# Altium PCB USB-C-SMD_TYPE-C-6P.pcbdoc
Units mm, origin at the board's own origin, x right, y up, seen from the top; angles counter-clockwise.
Board outline 22.74 x 20.06 mm, 2 copper layers (Top Layer, Bottom Layer); 1 components, 0 nets, 10 pads, 0 vias.
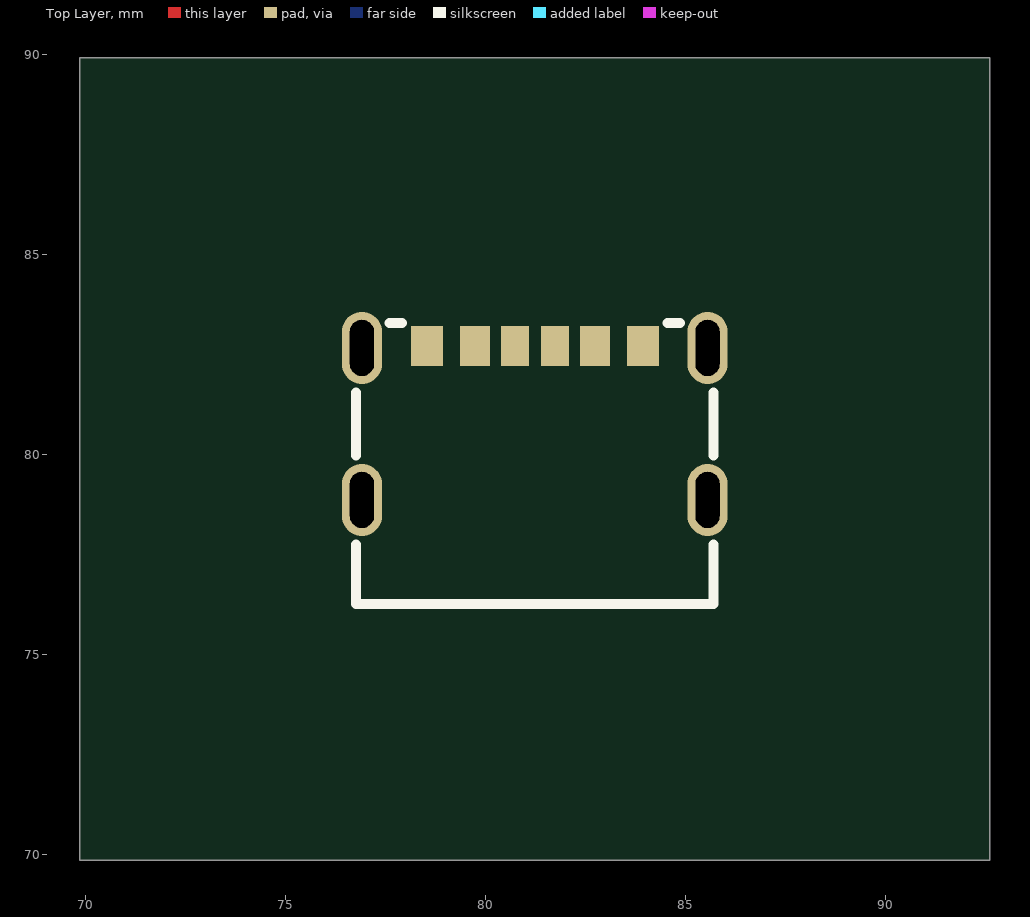
[diagram p0: Top Layer view]
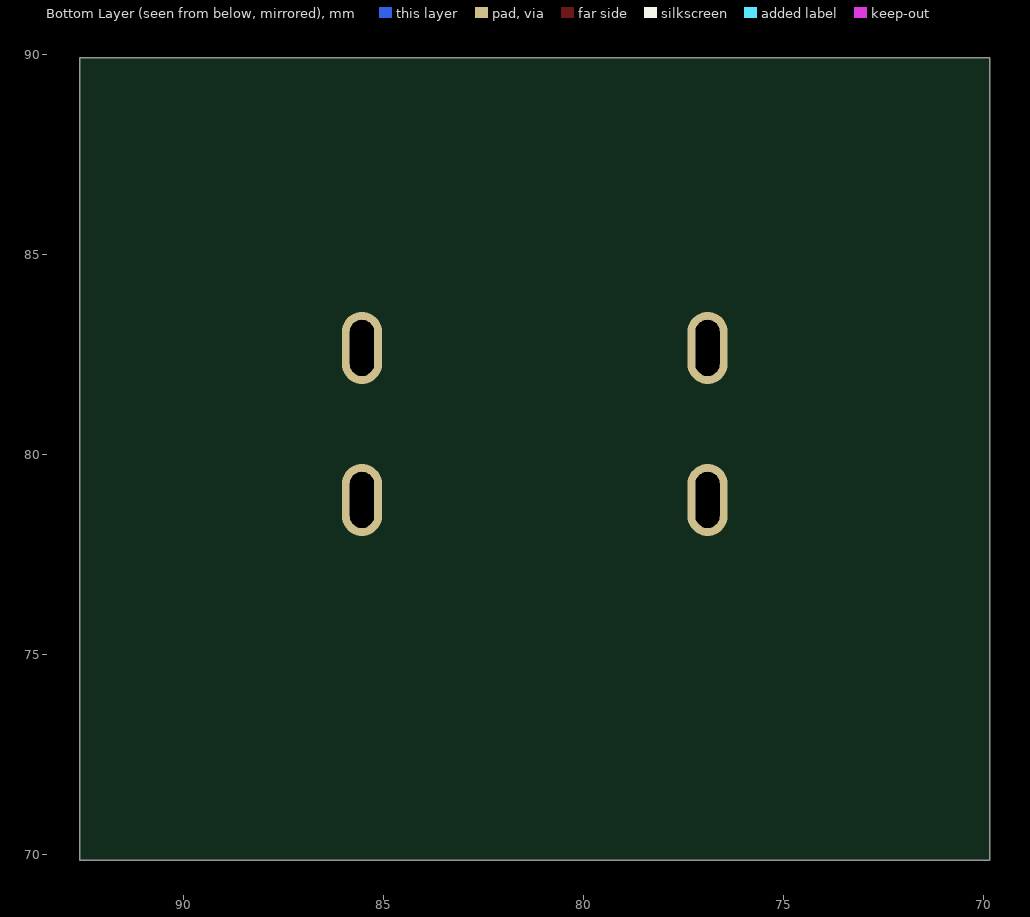
[diagram p1: Bottom Layer view, seen from below]

## Layer stack, top to bottom
Top Layer: signal copper (thickness not stored)
Dielectric: dielectric 0.32, FR-4, Dk 4.8
Bottom Layer: signal copper (thickness not stored)

## Board outline
92.59,69.85 69.85,69.85 69.85,89.91 92.59,89.91

## Components (designator, comment, footprint, x,y, rotation, side; value= is the part's Value field where it differs from the comment)
? "USB-C-SMD_TYPE-C-6P" USB-C-SMD_TYPE-C-6P 81.22,80.785 r0 top

## Footprints (in the part's own frame and the unit in brackets; to place one, negate y for a bottom-side part, rotate by r counter-clockwise, add the part's x,y. Pads: shape width x height; smd on the part's side, far side on the other; paste and mask are expansions set on the pad)
USB-C-SMD_TYPE-C-6P [mm]
  oval 1x1.8 hole 0.6 slot 1.4 at 90 deg: 1(-4.32,-1.925) 1(-4.32,1.875) 2(4.32,-1.925) 2(4.32,1.875)
  rect 0.7x1 smd: A5(-0.499,1.925) B5(0.501,1.925)
  rect 0.75x1 smd: A9(1.501,1.925) B9(-1.499,1.925)
  rect 0.8x1 smd: A12(2.701,1.925) B12(-2.699,1.925)
  silkscreen extent -4.47,-4.52 4.47,2.5

## Nets (pads, with @x,y where several pads share a name; then routed paths per layer and width w, separated by ;. In a path a pad name is that pad's centre, name@x,y a point inside that pad or via, vN(x,y) a via of type N, cw(c..) or ccw(c..) an arc to the next point about the centre after c; other vN are vias at no path point)
pads on no net: ?.1 ?.2 ?.A5 ?.A9 ?.A12 ?.B5 ?.B9 ?.B12